# Altium PCB PCB1.PcbDoc (part 3 of 3)
Units mm, origin at the board's own origin, x right, y up, seen from the top; angles counter-clockwise.
Board outline 200 x 55 mm, 4 copper layers (Top Layer, Power Layer, GND Layer, Bottom Layer), stack 1.714 mm thick; 304 components, 225 nets, 1091 pads, 659 vias.
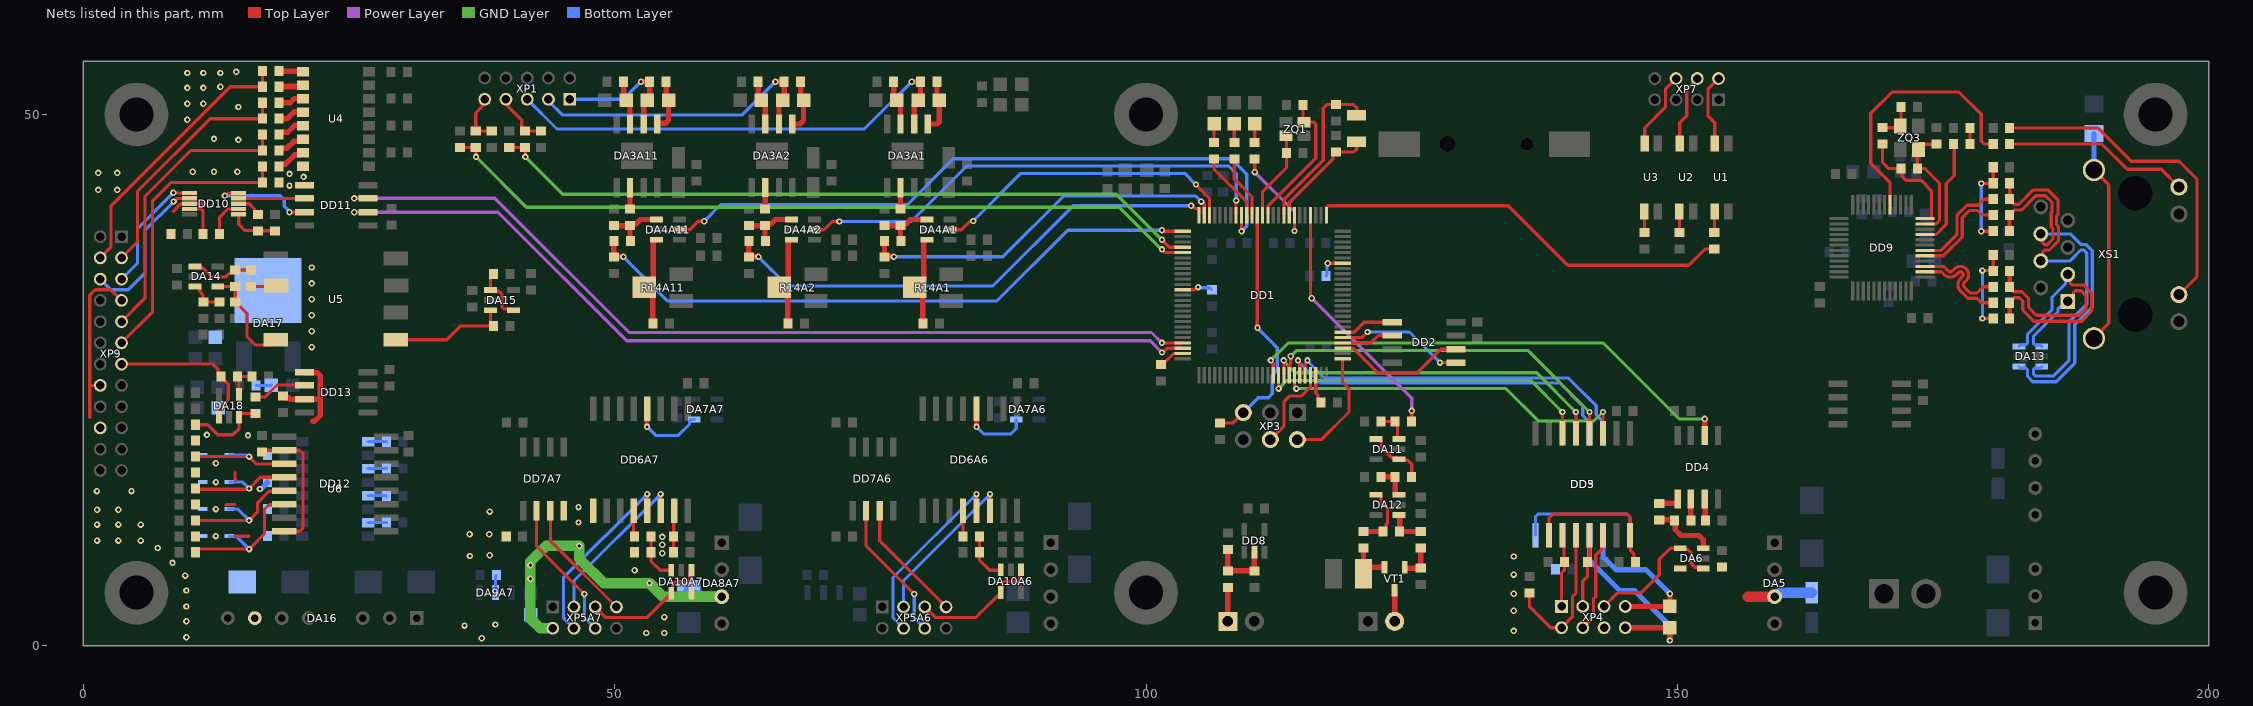
[diagram p5: the nets of this part, all layers, seen from the top]

## Via types
v1: diameter 0.6, hole 0.3, Top Layer to Bottom Layer, tented both sides, 643 vias
v2: diameter 0.6, hole 0.3, Top Layer to Bottom Layer, 12 vias
v3: diameter 0.8, hole 0.4, Top Layer to Bottom Layer, tented both sides, 4 vias

## Nets (pads, with @x,y where several pads share a name; then routed paths per layer and width w, separated by ;. In a path a pad name is that pad's centre, name@x,y a point inside that pad or via, vN(x,y) a via of type N, cw(c..) or ccw(c..) an arc to the next point about the centre after c; other vN are vias at no path point) (continued)
GND_DRVA7: C45A7.2 C46A7.2 C47A7.2 C48A7.1 C49A7.2 C50A7.2 C51A7.2 DA8A7.3 DA9A7.2 DA10A7.5 DD6A7.9 DD6A7.15 DD7A7.4 XP5A7.2 | length 38.1
  Top Layer w0.3: C50A7.2@55.525,8.8 C46A7.2@55.525,10.3 55.56,10.335 55.56,12.665 DD6A7.15@55.595,12.7
  GND Layer w1: XP5A7.2@44.175,1.65 42.994,1.65 42.075,2.569 v1(42.075,6.3) v1(42.075,7.571) 42.075,7.9 43.575,9.4 v1(46.675,9.4) 46.675,8.2 48.975,5.9 v1(53.275,5.9) 54.555,4.62 DA8A7.3@60.075,4.62
  Bottom Layer w0.2: C51A7.2@38.775,6.559 C51A7.2@38.883,6.667
  Bottom Layer w0.3: DA9A7.2@38.775,5 38.775,5.075 C51A7.2@38.775,6.559
  Bottom Layer w1: C45A7.2@56.975,5.2 57.475,4.7 58.081,4.7 58.161,4.62 DA8A7.3@60.075,4.62
  other v1: 37.5,0.7 52.975,1.2 54.675,1.2 35.875,1.9 38.775,2 54.675,2.7 51.875,7.1 36.375,8.45 38.25,8.525 54.475,8.7 54.475,9.5 54.475,10.25 36.35,10.5 38.2,10.5 46.6,11.6 38.244,12.625 46.6,13.05
GND_HW: C75.2 C76.2 C80.2 C81.2 C88.1 C89.2 C90.2 C91.2 DA16.7 DA17.2 DD10.1 DD10.8 DD11.5 DD12.2 DD12.8 DD13.5 DD13.7 R50.1 R51.1 R53.1 R54.1 R56.1 R57.1 R58.1 R60.1 R82.1 R84.1 R85.1 R86.1 R88.1 R89.1 U4.2 U4.4 U4.6 U4.8 VD4.2 VD5.2 VD6.2 VD7.2 XP9.7 XP9.16 XP9.20 | length 62.1
  Top Layer w0.3: 0.6,21.5 0.6,24.5 ; XP9.16@1.6,24.5 0.6,24.5 ; XP9.7@3.6,32.5 2.6,33.5 1.1,33.5 0.6,33 0.6,24.5 ; 8.473,40.85 8.737,41.114 8.737,41.162 9.176,41.6 DD10.8@10,41.6 11.411,41.6 11.543,41.468 ; 13.444,13.27 13.474,13.3 14.275,13.3 ; 14.275,10.3 15.6,10.3 ; 14.275,16.3 14.288,16.287 14.288,15.627 14.345,15.57 ; 14.625,40.35 14.625,39.65 15.196,39.079 16.396,39.079 C76.2@16.425,39.05 C80.2@18.025,39.05 ; C81.2@16.764,18.4 20.344,18.4 20.68,18.064 20.68,11.109 20.351,10.78 DD12.8@18.9,10.78 ; R50.1@18.404,52.621 18.534,52.75 U4.2@20.68,52.75 U4.2@20.53,52.6
  Top Layer w0.5: R56.1@18.425,46.6 18.425,46.65 18.6,46.825 19.171,46.825 19.811,47.465 20.475,47.465 U4.6@20.68,47.67 ; R53.1@18.425,49.6 19.223,49.6 19.88,50.257 20.633,50.257 U4.4@20.68,50.21 ; R50.1@18.425,52.6 U4.2@20.53,52.6 ; C89.2@18.8,23.5 18.975,23.325 19.328,23.325 19.453,23.2 22.3,23.2 ; DD13.5@20.8,25.75 20.85,25.7 22.007,25.7 22.3,25.407 22.3,23.2 ; 21.582,21.125 21.741,21.125 22.3,21.684 22.3,23.2
  Bottom Layer w0.3: C90.2@16.25,24.5 17.665,24.5 C88.1@17.7,24.535
  Bottom Layer w0.5: v1(16.621,14.75) 16.64,14.769 16.744,14.769 17.325,15.35 R86.1@17.325,15.4
  other v1: 9.7,0.8 9.7,2.3 9.7,3.7 9.7,5.2 9.6,6.6 8.4,7.8 7,9.2 1.3,9.9 3.3,9.9 5.4,9.9 12.475,10.32 1.3,11.4 3.3,11.4 5.4,11.4 1.3,12.8 3.3,12.8 12.475,12.86 1.283,14.55 4.537,14.55 12.475,15.4 12.477,17.179 15.5,19.8 11.632,19.845 21.5,28.1 21.5,29.6 21.5,31.1 21.5,32.6 21.5,34.1 21.5,35.6 1.4,42.9 3.2,42.9 19.4,43.3 20.737,44.125 19.4,44.4 1.4,44.5 3.2,44.5 10.3,44.6 12.3,44.6 14.5,44.6 14.6,47.6 12.3,47.7 9.8,49.5 14.6,50.7 9.8,51 11.3,51 9.8,52.5 11.3,52.5 12.9,52.6 9.8,53.9 11.3,53.9 12.9,53.9 14.4,54
GND_PS: C35.2 C36.2 C37.2 C38.2 C39.2 C40.2 DA5.3 DA6.5 DD3.2 DD3.8 DD4.5 DD4.7 DD5.9 DD5.16 XP4.6 | length 36.7
  Top Layer w0.3: DD3.2@137.92,10.41 137.92,12.013 138.307,12.4 145.268,12.4 145.54,12.128 DD3.8@145.54,10.41 145.568,10.382 145.568,8.985 145.925,8.628 C36.2@145.925,8.325 ; C36.2@146.025,8.15 C36.2@146.3,7.875
  Top Layer w0.5: C39.2@148.3,13.4 149.974,13.4 150.024,13.45 DD4.5@150.024,13.8 ; DD4.7@152.574,13.8 152.612,13.762 152.612,11.838 C37.2@152.65,11.8
  Top Layer w1: 156.61,4.62 DA5.3@159.15,4.62
  Bottom Layer w0.3: DD5.16@136.65,10.41 136.65,12.15 136.9,12.4 145.268,12.4 145.54,12.128 DD5.9@145.54,10.41
  Bottom Layer w1: DA5.3@159.15,4.62 159.258,4.62 159.638,5 C35.2@162.65,5
  other v1: 134.6,1.4 134.6,3.3 134.6,4.9 134.6,6.7 134.6,8.4
GUIDE_LAS: DD1.4 R23.1 | length 23.4
  Top Layer w0.3: DD1.4@115.475,40.525 115.475,32.906 115.6,32.781 v1(115.6,32.7) ; R23.1@125,21.1 v1(125,22.1)
  Power Layer w0.3: v1(115.6,32.7) 125,23.3 v1(125,22.1)
IL1_HW: R50.2 R63.1 XP9.4 | length 25.8
  Top Layer w0.3: XP9.4@1.6,36.5 2.6,37.5 2.6,41.376 13.824,52.6 R50.2@16.949,52.6 ; R50.2@16.875,52.6 R63.1@16.875,54.1
IL2_HW: R53.2 R64.1 XP9.3 | length 23
  Top Layer w0.3: XP9.3@3.6,36.5 5.1,38 5.1,42.77 11.93,49.6 R53.2@16.875,49.6 R64.1@16.875,51.1
KEY_HW: R56.2 R65.1 XP9.9 | length 27
  Top Layer w0.3: XP9.9@3.6,30.5 5.8,32.7 5.8,42.279 10.121,46.6 R56.2@16.85,46.6 ; R56.2@16.875,46.6 R65.1@16.875,48.1
LED1: DD1.16 R5.1 | length 6.5
  Top Layer w0.3: R5.1@106.4,45.8 106.4,44.848 109.475,41.773 DD1.16@109.475,40.525
LED2: DD1.15 R6.1 | length 6
  Top Layer w0.3: R6.1@108.31,45.8 108.31,43.94 109.975,42.275 DD1.15@109.975,40.525
LED3: DD1.7 R7.1 | length 9.8
  Top Layer w0.3: v1(110.225,44.575) R7.1@110.225,45.8 ; v1(113.975,39.025) DD1.7@113.975,40.525
  Power Layer w0.3: v1(110.225,44.575) 113.975,40.825 v1(113.975,39.025)
LNKn: DD9.17 R44.2 | length 25.2
  Top Layer w0.3: DD9.17@170,41.5 170,43.6 168.2,45.4 168.2,50.1 170.2,52.1 176.5,52.1 178.6,50 178.6,47.5 178.888,47.212 R44.2@179.725,47.212
MEM_CS: DD1.81 DD2.1 | length 5.1
  Top Layer w0.3: DD1.81@118.5,29.5 119.6,29.5 120.546,30.446 DD2.1@123.171,30.446
MEM_MISO: DD1.79 DD2.2 | length 5
  Top Layer w0.3: DD1.79@118.5,28.5 121.15,28.5 121.846,29.196 DD2.2@123.171,29.196
MEM_MOSI: DD1.80 DD2.5 | length 12.1
  Top Layer w0.3: DD1.80@118.5,29 120.314,29 120.839,29.525 v1(120.85,29.525) ; v1(127.671,26.646) DD2.5@129.171,26.646
  Bottom Layer w0.3: v1(120.85,29.525) 124.791,29.525 v1(127.671,26.646)
MEM_SCLK: DD1.78 DD2.6 | length 12.5
  Top Layer w0.3: DD1.78@118.5,28 119.5,28 121.812,25.688 125.513,25.688 127.721,27.896 DD2.6@129.171,27.896
MP_EN_HW: R58.2 R66.1 XP9.11 | length 27.1
  Top Layer w0.3: XP9.11@3.6,28.5 6.5,31.4 6.5,41.83 8.27,43.6 R58.2@16.8,43.6 ; R58.2@16.875,43.6 R66.1@16.875,45.1
NetC12_1: C12.1 DD1.49 | length 2.5
  Top Layer w0.3: C12.1@101.4,26.45 101.675,26.725 101.826,26.725 102.601,27.5 DD1.49@103.45,27.5
NetC14_1: C14.1 DD1.73 | length 2.8
  Top Layer w0.3: DD1.73@115.975,25.475 115.975,23.777 116.183,23.569 116.183,23.167 C14.1@116.45,22.9
NetC23A1_2: C23A1.2 DA3A1.3 R8A1.1 | length 4.2
  Top Layer w0.5: C23A1.2@76.25,53.075 76.25,51.64 R8A1.1@76.55,51.34 76.9,50.99 DA3A1.3@76.9,49.105
NetC23A2_2: C23A2.2 DA3A2.3 R8A2.1 | length 4.2
  Top Layer w0.3: R8A2.1@63.535,51.595 R8A2.1@63.8,51.33
  Top Layer w0.5: R8A2.1@63.503,51.606 C23A2.2@63.503,53.076 ; R8A2.1@63.768,51.341 64.153,50.956 64.153,50.676 64.166,50.663 DA3A2.3@64.166,49.106
NetC23A11_2: C23A11.2 DA3A11.3 R8A11.1 | length 4.4
  Top Layer w0.5: C23A11.2@50.85,53.075 50.85,51.565 R8A11.1@51.075,51.34 ; R8A11.1@50.962,51.453 51.45,50.965 DA3A11.3@51.45,49.105
NetC24A1_1: C24A1.1 DA3A1.1 R9A1.1 | length 5
  Top Layer w0.5: DA3A1.1@79.45,49.105 80.35,49.105 80.55,49.305 R9A1.1@80.55,51.34 80.335,51.555 C24A1.1@80.335,53.075
NetC24A2_1: C24A2.1 DA3A2.1 R9A2.1 | length 4.9
  Top Layer w0.5: DA3A2.1@66.716,49.106 67.441,49.106 67.768,49.433 67.768,51.341 67.503,51.606 C24A2.1@67.503,53.076
NetC24A11_1: C24A11.1 DA3A11.1 R9A11.1 | length 4.9
  Top Layer w0.5: DA3A11.1@54,49.105 54,49.112 54.05,49.162 54.782,49.162 55.075,49.455 R9A11.1@55.075,51.34 54.85,51.565 C24A11.1@54.85,53.075
NetC39_1: C39.1 DA6.3 R17.2 | length 6.1
  Top Layer w0.5: C39.1@148.3,11.85 149.675,11.85 149.805,11.72 149.805,10.92 150.35,10.375 152.025,10.375 152.425,9.975 ; DA6.3@152.425,9.175 152.425,9.875
NetC49A6_1: C49A6.1 DA10A6.3 R22A6.2 | length 4.7
  Top Layer w0.3: R22A6.2@84.335,10.353 84.335,8.051 85.283,7.103 86.286,7.103 DA10A6.3@86.335,7.153
NetC49A7_1: C49A7.1 DA10A7.3 R22A7.2 | length 4.6
  Top Layer w0.3: R22A7.2@53.425,10.3 53.425,7.95 54.275,7.1 DA10A7.3@55.325,7.1
NetC52_1: C52.1 DA11.3 R23.2 | length 3.1
  Top Layer w0.3: C52.1@122.1,21.1 R23.2@123.45,21.1 123.675,20.875 DA11.3@123.675,19.45
NetC55_1: C55.1 DA12.1 R26.1 | length 3.5
  Top Layer w0.5: DA12.1@123.871,12.307 C55.1@123.871,10.757 R26.1@125.871,10.757
NetC55_2: C55.2 DA12.4 R27.1 | length 6.1
  Top Layer w0.3: DA12.4@121.65,14.207 121.975,14.207 122.1,14.082 122.1,13.907 122.1,13.5 122.731,12.869 122.731,11.583 122.596,11.447 122.596,11.032 C55.2@122.321,10.757
  Top Layer w0.5: R27.1@120.471,10.757 C55.2@122.321,10.757
NetC56_1: C56.1 DD8.2 R33.2 R34.1 | length 6.3
  Top Layer w0.5: R34.1@107.7,9.05 R33.2@107.7,7.05 C56.1@110.2,7.05 DD8.2@110.2,8.8
NetC59_1: C59.1 XS1.13 XS1.14 | length 20.4
  Top Layer w0.3: XS1.13@189.2,28.932 190.6,30.332 190.6,43.372 XS1.14@189.2,44.772
  Bottom Layer w0.5: XS1.14@189.2,44.772 C59.1@189.2,48.2
NetC61_1: C61.1 R35.2 R36.2 | length 8.1
  Top Layer w0.3: v1(178.7,30.8) 179.703,30.8 R35.2@179.725,30.778 ; v1(178.7,35.3) 179.703,35.3 R36.2@179.725,35.278 C61.1@179.725,36.778
  Bottom Layer w0.3: v1(178.7,30.8) v1(178.7,35.3)
NetC62_1: C62.1 R37.2 R38.2 | length 8.3
  Top Layer w0.3: v1(178.6,39) 179.7,39 R37.2@179.725,39.025 ; v1(178.6,43.5) 179.7,43.5 R38.2@179.725,43.525 C62.1@179.725,45.025
  Bottom Layer w0.3: v1(178.6,39) v1(178.6,43.5)
NetC66_1: C66.1 R48.2 ZQ3.3 | length 3.6
  Top Layer w0.3: R48.2@169.3,48.75 170.825,48.75 ZQ3.3@170.975,48.9 171.05,48.975 C66.1@171.05,50.7
NetC76_1: C76.1 DD10.3 | length 2.4
  Top Layer w0.3: DD10.3@14.6,41.6 15.6,41.6 16.1,41.1 16.1,40.875 16.375,40.6 C76.1@16.425,40.6
NetC78_1: C78.1 DD10.9 | length 3.4
  Top Layer w0.3: DD10.9@10.117,41.1 11.099,41.1 11.275,40.924 C78.1@11.275,38.75
NetC78_2: C78.2 DD10.2 | length 3.7
  Top Layer w0.3: C78.2@12.825,38.75 12.825,40.325 13.6,41.1 DD10.2@14.6,41.1
NetC79_1: C79.1 DA14.1 R69.1 | length 6
  Top Layer w0.3: DA14.1@10.502,35.7 10.627,35.575 11.225,35.575 12.09,34.71 13.413,34.71 13.777,35.075 14.025,35.075 C79.1@14.3,35.35 ; C79.1@14.25,35.35 R69.1@15.8,35.35
NetC79_2: C79.2 DA14.4 R71.1 U5.4 | length 10.1
  Top Layer w0.3: DA14.4@12.652,33.8 C79.2@14.3,33.8 R71.1@14.3,32.35 14.35,32.35 15.4,31.3 15.4,29.1 16.2,28.3 17.624,28.3 U5.4@18.124,28.8
NetC92_1: C92.1 DA18.3 R81.2 | length 7.4
  Top Layer w0.3: C92.1@10.575,20.8 11.7,20.8 12.65,19.85 14.075,19.85 14.658,20.433 DA18.3@14.658,21.5 ; DA18.3@14.658,21.725 14.783,21.85 R81.2@16.2,21.85
NetDA3A1_6: DA3A1.6 R10A1.1 | length 2.2
  Top Layer w0.5: R10A1.1@76.9,40.93 DA3A1.6@76.9,43.105
NetDA3A2_6: DA3A2.6 R10A2.1 | length 2
  Top Layer w0.5: R10A2.1@64.15,41.08 64.158,41.088 DA3A2.6@64.158,43.098
NetDA3A11_6: DA3A11.6 R10A11.1 | length 2.2
  Top Layer w0.5: R10A11.1@51.45,40.93 DA3A11.6@51.45,43.105
NetDA4A1_1: DA4A1.1 R10A1.2 R11A1.1 R12A1.1 | length 5.8
  Top Layer w0.5: R11A1.1@75.4,39.53 R10A1.2@76.9,39.53 ; R12A1.1@76.9,37.98 76.9,39.38 77.075,39.555 77.075,39.655 77.125,39.705 77.413,39.705 77.813,40.105 DA4A1.1@79.402,40.105
NetDA4A1_3: DA4A1.3 R13A1.2 R14A1.2 | length 8.9
  Top Layer w0.5: R14A1.2@78.225,33.73 R14A1.2@78.25,33.73 ; R13A1.2@79,30.33 79,32.98 R14A1.2@78.25,33.73 ; DA4A1.3@79.356,38.186 79.081,38.186 79.075,38.18 79.075,34.48 78.325,33.73 R14A1.2@78.25,33.73
NetDA4A2_1: DA4A2.1 R10A2.2 R11A2.1 R12A2.1 | length 5.6
  Top Layer w0.5: R11A2.1@62.65,39.53 R10A2.2@64.15,39.53 ; R12A2.1@64.15,38.13 R10A2.2@64.15,39.53 ; DA4A2.1@66.65,40.105 65.125,40.105 64.725,39.705 64.325,39.705 R10A2.2@64.15,39.53
NetDA4A2_3: DA4A2.3 R13A2.2 R14A2.2 | length 8.5
  Top Layer w0.5: R14A2.2@65.831,33.186 66.325,33.68 66.325,38.18 66.339,38.194 DA4A2.3@66.65,38.194 ; R14A2.2@66.094,33.186 66.3,32.98 R13A2.2@66.3,30.33
NetDA4A11_1: DA4A11.1 R10A11.2 R11A11.1 R12A11.1 | length 5.8
  Top Layer w0.5: R11A11.1@49.95,39.53 R10A11.2@51.45,39.53 ; R12A11.1@51.45,37.98 51.45,39.38 51.625,39.555 51.625,39.655 51.675,39.705 52.025,39.705 52.425,40.105 DA4A11.1@53.95,40.105
NetDA4A11_3: DA4A11.3 R13A11.2 R14A11.2 | length 8.5
  Top Layer w0.5: R14A11.2@52.8,33.73 52.875,33.73 53.625,34.48 53.625,38.18 53.65,38.205 DA4A11.3@53.95,38.205 ; R13A11.2@53.6,30.33 R14A11.2@53.6,33.655
NetDA6_1: DA6.1 DA6.4 XP4.5 | length 13.8
  Top Layer w0.3: XP4.5@143.1,3.7 144.398,4.998 146.598,4.998 148.3,6.7 148.3,8.125 149.35,9.175 DA6.4@150.275,9.175 150.4,9.05 151,9.05 151.306,8.744 151.306,7.719 151.632,7.393 152.307,7.393 DA6.1@152.425,7.275
NetDA7A6_4: DA7A6.4 DD6A6.4 | length 6.8
  Top Layer w0.3: v1(84.05,20.6) v1@84.053,20.603 ; DD6A6.4@84.053,22.301 DD6A6.4@84.055,22.303
  Top Layer w0.5: v1@84.053,20.603 DD6A6.4@84.053,22.301
  Bottom Layer w0.3: v1(84.05,20.6) 84.725,19.925 87.27,19.925 87.789,20.443 DA7A6.4@87.789,21.3
NetDA7A7_4: DA7A7.4 DD6A7.4 | length 7.3
  Top Layer w0.3: v1(53.05,20.6) v1@53.052,20.602 ; DD6A7.4@53.052,22.298 DD6A7.4@53.055,22.3
  Top Layer w0.5: v1@53.052,20.602 DD6A7.4@53.052,22.298
  Bottom Layer w0.3: v1(53.05,20.6) 53.85,19.8 55.991,19.8 57.041,20.85 57.041,21.175 57.166,21.3 DA7A7.4@57.491,21.3
NetDA10A6_1: DA10A6.1 DA10A6.4 XP5A6.5 | length 12.2
  Top Layer w0.3: XP5A6.5@79.185,3.653 80.168,2.671 84.003,2.671 DA10A6.4@86.335,5.003 86.46,5.128 86.46,5.877 86.636,6.053 87.935,6.053 88.11,6.229 88.11,7.028 DA10A6.1@88.235,7.153
NetDA10A7_1: DA10A7.1 DA10A7.4 XP5A7.5 | length 12.1
  Top Layer w0.3: XP5A7.5@48.175,3.65 49.175,2.65 53.025,2.65 DA10A7.4@55.325,4.95 55.45,5.075 55.45,5.775 55.675,6 56.775,6 57.1,6.325 57.1,6.975 DA10A7.1@57.225,7.1
NetDA11_1: DA11.1 DA11.4 R24.1 | length 5.9
  Top Layer w0.3: DA11.4@121.65,19.45 121.975,19.45 122.1,19.325 122.1,18.7 123.125,17.675 123.675,17.675 123.881,17.469 124.631,17.469 125,17.1 R24.1@125,15.9
NetDA12_3: DA12.3 R24.2 R25.1 | length 3.4
  Top Layer w0.5: R25.1@122.1,15.9 R24.2@123.45,15.9 123.45,14.332 123.575,14.207 DA12.3@123.871,14.207
NetDA14_3: DA14.3 R55.2 R59.1 | length 3.5
  Top Layer w0.3: DA14.3@10.502,33.8 10.827,33.8 10.952,33.675 10.952,33.35 11.253,33.049 11.253,32.397 R55.2@11.3,32.35 R59.1@12.8,32.35
NetDA15_1: DA15.1 DA15.4 R76.1 | length 5.3
  Top Layer w0.3: R76.1@38.6,34.979 38.6,34.929 38.324,34.653 DA15.1@38.324,33.479 38.442,33.362 39.118,33.362 39.4,33.079 39.4,31.88 39.576,31.704 40.349,31.704 DA15.4@40.474,31.579
NetDA15_3: DA15.3 R75.1 U5.5 | length 11.2
  Top Layer w0.3: U5.5@29.399,28.8 34.2,28.8 35.479,30.079 R75.1@38.325,30.079 ; DA15.3@38.324,31.579 38.324,30.854 38.325,30.853 R75.1@38.325,30.079 ; R75.1@38.6,30.079 R75.1@38.325,30.079
NetDA18_4: DA18.4 R83.2 R87.1 | length 3.2
  Top Layer w0.3: DA18.4@14.658,23.65 14.658,25.197 R87.1@14.505,25.35 15.949,25.35 R83.2@15.966,25.333
NetDD1_37: DD1.37 R3.1 | length 2.9
  Top Layer w0.3: DD1.37@103.45,33.5 104.586,33.5 104.836,33.75 v1(104.9,33.75)
  Bottom Layer w0.3: v1(104.9,33.75) 104.957,33.693 105.998,33.693 R3.1@106.134,33.556
NetDD1_94: DD1.94 R4.1 | length 2.7
  Top Layer w0.3: v1(117.1,36) 117.875,36 DD1.94@118.5,36
  Bottom Layer w0.3: R4.1@116.95,34.8 117.025,34.875 117.025,35.925 v1(117.1,36)
NetDD3_3: DD3.3 R18.2 XP4.1 | length 6.9
  Top Layer w0.3: XP4.1@139.1,3.7 139.1,6.85 139.374,7.124 R18.2@139.374,7.875 139.328,7.922 139.328,10.272 DD3.3@139.19,10.41
NetDD3_4: DD3.4 R20.2 XP4.2 | length 14.4
  Top Layer w0.3: R20.2@136.075,4.95 136.075,3.725 138.1,1.7 XP4.2@139.1,1.7 140.124,2.724 140.124,4.599 140.46,4.935 DD3.4@140.46,10.41
NetDD3_5: DD3.5 R21.2 XP4.3 | length 7
  Top Layer w0.3: XP4.3@141.1,3.7 141.1,6.075 141.55,6.525 R21.2@141.55,7.875 141.73,8.055 DD3.5@141.73,10.41
NetDD3_6: DD3.6 XP4.4 | length 9.5
  Top Layer w0.3: XP4.4@141.1,1.7 142.1,2.7 142.1,4.4 142.328,4.628 142.328,8.527 142.85,9.049 142.85,10.26 DD3.6@143,10.41
NetDD4_6: DD4.6 R17.1 | length 2
  Top Layer w0.5: R17.1@151.275,11.8 DD4.6@151.274,13.8
NetDD5_11: DD5.11 R19.1 XP4.7 | length 15.2
  Top Layer w0.5: XP4.7@145.1,3.7 R19.1@149.3,3.7 v1(149.3,4.9)
  Bottom Layer w0.5: DD5.11@143,10.41 143,8.375 144.225,7.15 147.05,7.15 v1(149.3,4.9)
NetDD5_12: DD5.12 R19.2 XP4.8 | length 19.3
  Top Layer w0.5: XP4.8@145.1,1.7 R19.2@149.3,1.7 v1(149.3,0.5)
  Bottom Layer w0.5: DD5.12@141.73,10.41 141.73,8.043 144.598,5.175 145.986,5.175 149.3,1.861 v1(149.3,0.5)
NetDD6A6_12: DD6A6.12 R22A6.1 | length 2.4
  Top Layer w0.3: R22A6.1@82.785,10.353 DD6A6.12@82.785,12.753
NetDD6A6_13: DD6A6.13 XP5A6.4 | length 17.9
  Top Layer w0.3: DD6A6.13@84.055,12.703 84.059,12.707 v1@84.059,14.275
  Bottom Layer w0.3: XP5A6.4@77.185,1.653 76.198,2.641 76.198,6.423 v1(84.05,14.275)
NetDD6A6_14: DD6A6.14 XP5A6.3 | length 15.6
  Top Layer w0.3: DD6A6.14@85.325,12.703 85.333,12.711 v1@85.333,14.271
  Bottom Layer w0.3: XP5A6.3@77.185,3.653 77.185,6.135 v1(85.325,14.275)
NetDD6A7_12: DD6A7.12 R22A7.1 | length 2.4
  Top Layer w0.3: DD6A7.12@51.785,12.7 51.785,10.39 R22A7.1@51.875,10.3
NetDD6A7_13: DD6A7.13 XP5A7.4 | length 17.9
  Top Layer w0.3: DD6A7.13@53.055,12.7 53.058,12.704 v1(53.058,14.272)
  Bottom Layer w0.3: XP5A7.4@46.175,1.65 45.175,2.65 45.175,6.388 v1(53.058,14.272)
NetDD6A7_14: DD6A7.14 XP5A7.3 | length 15.6
  Top Layer w0.3: DD6A7.14@54.325,12.7 54.326,12.701 v1(54.326,14.274)
  Bottom Layer w0.3: XP5A7.3@46.175,3.65 46.175,6.122 v1(54.326,14.274)
NetDD7A6_2: DD7A6.2 XP5A6.6 | length 13.3
  Top Layer w0.3: DD7A6.2@73.65,12.7 73.65,9.425 v1(78.2,4.875)
  Bottom Layer w0.3: v1(78.2,4.875) 78.2,2.638 XP5A6.6@79.185,1.653
NetDD7A6_3: DD7A6.3 XP5A6.7 | length 11.6
  Top Layer w0.3: DD7A6.3@74.95,12.7 74.95,9.888 XP5A6.7@81.185,3.653
NetDD7A7_2: DD7A7.2 XP5A7.6 | length 13.3
  Top Layer w0.3: DD7A7.2@42.65,12.7 42.65,9.375 v1(47.15,4.875)
  Bottom Layer w0.3: v1(47.15,4.875) 47.15,2.675 XP5A7.6@48.175,1.65
NetDD7A7_3: DD7A7.3 XP5A7.7 | length 11.6
  Top Layer w0.3: DD7A7.3@43.95,12.7 43.95,9.875 XP5A7.7@50.175,3.65
NetDD9_9: DD9.9 R47.2 | length 10.2
  Top Layer w0.3: DD9.9@173.3,38.7 174.05,38.7 174.345,38.7 175.3,39.655 175.3,43.5 176.051,44.251 R47.2@176.051,47.126
NetDD10_4: DD10.4 DD11.6 | length 6.2
  Top Layer w0.3: DD10.4@14.6,42.1 DD11.6@20.8,42.1
NetDD10_5: DD10.5 DD11.7 | length 9.9
  Top Layer w0.3: v1(13.325,42.35) 13.406,42.35 13.656,42.6 DD10.5@14.625,42.6 ; v1(19.4,40.8) DD11.7@20.8,40.8
  Bottom Layer w0.3: v1(13.325,42.35) 18.525,42.35 18.918,41.957 18.918,41.363 19.4,40.881 v1(19.4,40.8)
NetDD12_3: DD12.3 R67.2 VD7.1 | length 11
  Top Layer w0.3: R67.2@10.575,17.8 13.875,17.8 v1(15.6,17.8) 16.3,17.1 18.87,17.1 DD12.3@18.9,17.13 DD12.3@19.4,17.13
  Bottom Layer w0.3: VD7.1@13.75,17.94 15.379,17.94 15.519,17.8 v1(15.6,17.8)
NetDD12_4: DD12.4 R61.2 VD6.1 | length 10.9
  Top Layer w0.3: R61.2@10.575,14.8 10.643,14.732 15.45,14.732 15.519,14.8 v1(15.6,14.8) 16.66,15.86 DD12.4@18.9,15.86
  Bottom Layer w0.3: VD6.1@13.75,15.4 15,15.4 v1(15.6,14.8)
NetDD12_5: DD12.5 R68.2 VD5.1 | length 12.4
  Top Layer w0.3: R68.2@10.575,11.8 v1(15.6,11.8) 16.4,12.6 16.4,13.47 17.476,14.546 18.856,14.546 DD12.5@18.9,14.59
  Bottom Layer w0.3: VD5.1@13.612,12.872 14.534,12.872 v1@15.603,11.803
NetDD12_6: DD12.6 R62.2 VD4.1 | length 13.9
  Top Layer w0.3: R62.2@10.575,8.8 10.575,8.825 10.85,9.1 v1(15.6,9.1) 17.05,10.55 17.05,12.85 17.476,13.276 18.856,13.276 DD12.6@18.9,13.32
  Bottom Layer w0.3: VD4.1@13.75,10.3 13.758,10.292 14.408,10.292 v1(15.6,9.1)
NetDD13_6: DD13.6 R81.1 | length 5.1
  Top Layer w0.3: R81.1@16.2,23.4 17.09,23.4 18.225,24.535 20.765,24.535 DD13.6@20.8,24.5
NetR5_2: R5.2 VD1.1 | length 1.8
  Top Layer w0.3: R5.2@106.4,47.35 VD1.1@106.4,49.1
NetR6_2: R6.2 VD2.1 | length 1.7
  Top Layer w0.3: R6.2@108.31,47.35 VD2.1@108.31,49.1
NetR7_2: R7.2 VD3.1 | length 1.8
  Top Layer w0.3: R7.2@110.225,47.31 VD3.1@110.225,49.11
NetR26_2: R26.2 R28.2 VT1.1 | length 3.5
  Top Layer w0.5: VT1.1@124.346,7.382 124.421,7.307 R28.2@125.871,7.307 ; R28.2@125.85,7.307 R26.2@125.85,9.207
NetR27_2: R27.2 R29.2 VT1.2 | length 4.6
  Top Layer w0.5: R29.2@120.446,6.782 R29.2@120.471,6.807 ; R27.2@120.471,9.207 R29.2@120.471,6.807 ; VT1.2@122.446,7.382 121.046,7.382 R29.2@120.471,6.807
NetR30_1: R30.1 U1.1 | length 2
  Top Layer w0.3: R30.1@153.475,38.875 153.475,38.95 153.5,38.975 U1.1@153.5,40.875
NetR31_1: R31.1 U2.1 | length 2
  Top Layer w0.3: R31.1@150.2,38.875 150.2,38.95 U2.1@150.2,40.875
NetR32_1: R32.1 U3.1 | length 2
  Top Layer w0.3: R32.1@146.9,38.875 146.9,38.95 U3.1@146.9,40.875
NetR33_1: R33.1 XP8.1 | length 3.2
  Top Layer w0.5: XP8.1@107.7,2.3 R33.1@107.7,5.5
NetR41_1: R41.1 XS1.10 | length 31.2
  Top Layer w0.3: R41.1@181.275,48.712 189.588,48.712 192.7,45.6 197.2,45.6 198.9,43.9 198.9,34.74 XS1.10@197.2,33.04
NetR44_1: R44.1 XS1.12 | length 17.6
  Top Layer w0.3: R44.1@181.275,47.212 189.947,47.212 192.326,44.832 195.538,44.832 XS1.12@197.2,43.17
NetR45_2: R45.2 R47.1 | length 1.5
  Top Layer w0.3: R47.1@177.525,47.212 R45.2@177.525,48.712
NetR63_2: R63.2 U4.1 | length 2.3
  Top Layer w0.3: R63.2@18.425,54.1 R63.2@18.456,54.069 ; U4.1@20.631,54.069 U4.1@20.68,54.02
  Top Layer w0.5: R63.2@18.456,54.069 U4.1@20.631,54.069
NetR64_2: R64.2 U4.3 | length 2.4
  Top Layer w0.5: R64.2@18.425,51.1 19.475,51.1 19.88,51.505 20.655,51.505 U4.3@20.68,51.48
NetR65_2: R65.2 U4.5 | length 2.7
  Top Layer w0.5: R65.2@18.425,48.1 18.425,48.15 18.6,48.325 19.239,48.325 19.88,48.966 20.654,48.966 U4.5@20.68,48.94
NetR66_2: R66.2 U4.7 | length 2.8
  Top Layer w0.5: R66.2@18.425,45.1 18.425,45.15 18.6,45.325 19.032,45.325 19.902,46.195 20.475,46.195 U4.7@20.68,46.4
NetR69_2: R69.2 U5.2 | length 2.4
  Top Layer w0.3: R69.2@15.8,33.8 18.074,33.8 U5.2@18.174,33.9
NetR77_1: R77.1 U6.1 | length 1.7
  Bottom Layer w0.3: U6.1@26.82,19.21 28.515,19.21 R77.1@28.525,19.2
NetR78_1: R78.1 U6.3 | length 1.7
  Bottom Layer w0.3: U6.3@26.82,16.67 28.495,16.67 R78.1@28.525,16.7
NetR79_1: R79.1 U6.5 | length 1.7
  Bottom Layer w0.3: U6.5@26.82,14.13 28.495,14.13 R79.1@28.525,14.1
NetR80_1: R80.1 U6.7 | length 1.7
  Bottom Layer w0.3: U6.7@26.82,11.59 26.83,11.6 R80.1@28.525,11.6
NetU1_4: U1.4 XP7.2 | length 6.8
  Top Layer w0.3: U1.4@153.525,47.275 153.525,49.225 152.875,49.875 152.875,52.375 XP7.2@153.875,53.375
NetU2_4: U2.4 XP7.4 | length 6.8
  Top Layer w0.3: U2.4@150.225,47.275 150.225,49.225 150.878,49.878 150.878,52.378 XP7.4@151.875,53.375
NetU3_4: U3.4 XP7.6 | length 7.3
  Top Layer w0.3: U3.4@146.925,47.275 146.925,48.725 148.875,50.675 148.875,52.375 XP7.6@149.875,53.375
NetVT1_3: VT1.3 XP6.2 | length 3
  Top Layer w0.3: XP6.2@123.371,2.257 XP6.2@123.396,2.282
  Top Layer w0.5: XP6.2@123.396,2.282 VT1.3@123.396,5.232
NRST: C17.1 DD1.14 XP3.5 | length 23.7
  Top Layer w0.3: C17.1@107.083,20.975 108.195,20.975 XP3.5@109.16,21.94 ; DD1.14@110.475,40.525 110.475,29.939 v1(110.487,29.928)
  Bottom Layer w0.3: XP3.5@109.16,21.94 110.553,23.333 111.508,23.333 111.875,23.7 111.875,25.457 112.354,25.936 112.354,28.061 111.424,28.99 v1(110.487,29.928)
OSC0: C18.1 DD1.12 ZQ1.1 | length 13.3
  Top Layer w0.3: DD1.12@111.475,40.525 111.475,41.375 115.975,45.875 115.975,49.099 115.799,49.275 ZQ1.1@114.875,49.275 114.775,49.375 C18.1@114.775,50.875
OSC1: C21.1 DD1.13 ZQ1.3 | length 8.4
  Top Layer w0.3: DD1.13@110.975,40.525 110.975,42.75 113.225,45 113.225,46.225 C21.1@113.15,46.3 ; ZQ1.3@113.175,47.975 113.225,47.925 C21.1@113.225,46.375
OSC32_0: C19.1 DD1.8 ZQ2.1 | length 10.5
  Top Layer w0.3: DD1.8@113.475,40.525 113.475,41.675 117.582,45.782 117.582,46.2 117.857,46.475 119.575,46.475 119.825,46.725 ZQ2.1@119.825,47.425
OSC32_1: C20.1 DD1.9 ZQ2.2 | length 15.7
  Top Layer w0.3: DD1.9@112.975,40.525 112.975,41.978 116.675,45.678 116.675,50.575 117.025,50.925 C20.1@117.875,50.925 119.525,50.925 119.825,50.625 ZQ2.2@119.825,49.925
PD1: C24A1.2 DA3A1.2 R9A1.2 XP1.5 | length 44.2
  Top Layer w0.3: R9A1.2@78.2,50.99 R9A1.2@78.55,51.34 R9A1.2@78.785,51.575
  Top Layer w0.5: v1(77.95,53.075) C24A1.2@78.785,53.075 R9A1.2@78.785,51.575 ; DA3A1.2@78.2,49.105 R9A1.2@78.2,50.99
  Bottom Layer w0.3: XP1.5@41.774,51.425 44.574,48.625 73.5,48.625 v1(77.95,53.075)
PD1_ADC: C27A1.1 DD1.24 R12A1.2 | length 35.3
  Top Layer w0.3: v1(105.198,41.798) 105.279,41.798 105.427,41.65 105.469,41.65 105.475,41.644 DD1.24@105.475,40.525
  Top Layer w0.5: R12A1.2@75.375,38.075 75.387,38.062 75.387,36.612 C27A1.1@75.4,36.6 v1(76.275,36.6)
  Bottom Layer w0.3: v1(76.275,36.6) 86.525,36.6 92.25,42.325 104.664,42.325 105.191,41.798 v1(105.198,41.798)
PD1_ERR: DA4A1.5 DD1.23 | length 29.2
  Top Layer w0.3: DA4A1.5@81.55,39.155 82.632,39.155 83.394,39.918 83.693,39.918 v1(83.75,39.975) ; v1(104.7,43.4) 105.975,42.125 DD1.23@105.975,40.525
  Bottom Layer w0.3: v1(83.75,39.975) 88.225,44.45 103.65,44.45 v1(104.7,43.4)
PD2: C24A2.2 DA3A2.2 R9A2.2 XP1.3 | length 28.4
  Top Layer w0.3: R9A2.2@65.498,51.028 R9A2.2@65.985,51.515
  Top Layer w0.5: v1(65.125,53.075) C24A2.2@65.953,53.076 R9A2.2@65.953,51.526 ; DA3A2.2@65.466,49.106 R9A2.2@65.466,51.039
  Bottom Layer w0.3: XP1.3@43.774,51.425 43.774,51.236 45.054,49.955 62.005,49.955 v1(65.125,53.075)
PD2_ADC: C27A2.1 DD1.25 R12A2.2 | length 48.8
  Top Layer w0.3: v1(104.242,41.4) 104.323,41.4 104.573,41.15 104.975,41.15 DD1.25@104.975,40.525
  Top Layer w0.5: R12A2.2@62.625,38.075 62.625,36.625 C27A2.1@62.65,36.6 v1(63.525,36.6)
  Bottom Layer w0.3: v1(63.525,36.6) 66.275,33.85 85.591,33.85 93.141,41.4 v1(104.242,41.4)
PD2_ERR: DA4A2.5 DD1.18 | length 46.4
  Top Layer w0.3: DA4A2.5@68.8,39.155 69.705,39.155 70.475,39.925 v1(71.15,39.925) ; DD1.18@108.475,40.525 108.475,41.875 v1(108.5,41.9)
  Bottom Layer w0.3: v1(71.15,39.925) 77.913,39.925 83.138,45.15 107.769,45.15 108.5,44.419 v1(108.5,41.9)
PD3: C24A11.2 DA3A11.2 R9A11.2 XP1.1 | length 12.4
  Top Layer w0.5: v1(52.475,53.075) C24A11.2@53.3,53.075 53.3,51.565 R9A11.2@53.075,51.34 52.75,51.015 DA3A11.2@52.75,49.105
  Bottom Layer w0.3: XP1.1@45.774,51.425 50.825,51.425 v1(52.475,53.075)
PD3_ADC: C27A11.1 DD1.26 R12A11.2 | length 59.5
  Top Layer w0.3: v1(101.5,39.1) 101.581,39.1 101.681,39 DD1.26@103.45,39
  Top Layer w0.5: R12A11.2@49.925,38.075 49.925,36.625 C27A11.1@49.95,36.6 v1(50.825,36.6)
  Bottom Layer w0.3: v1(50.825,36.6) 54.969,32.456 85.981,32.456 92.625,39.1 v1(101.5,39.1)
PD3_ERR: DA4A11.5 DD1.17 | length 63.8
  Top Layer w0.3: DA4A11.5@56.1,39.155 57.08,39.155 57.875,39.95 v1(58.425,39.95) ; DD1.17@108.975,40.525 108.975,39.025 v1(109,39)
  Bottom Layer w0.3: v1(58.425,39.95) 60,41.525 77.575,41.525 81.875,45.825 108.016,45.825 109.475,44.366 109.475,39.475 v1(109,39)
PMO_HW: DA18.1 R87.2 XP9.13 | length 14.5
  Top Layer w0.3: XP9.13@3.6,26.5 12.2,26.5 12.684,26.016 12.684,25.621 R87.2@12.955,25.35 ; DA18.1@12.758,21.5 12.883,21.625 12.883,22.372 13.635,23.124 13.635,24.62 R87.2@12.955,25.3
POWER_IND: DD1.1 R30.2 | length 40.2
  Top Layer w0.3: DD1.1@116.975,40.525 116.975,41.224 117.151,41.4 134.1,41.4 139.7,35.8 151.075,35.8 152.6,37.325 R30.2@153.475,37.325
PS_ERR1: DD1.66 DD3.14 | length 31.5
  Top Layer w0.3: v1(112.475,24.2) DD1.66@112.475,25.475 ; v1(139.186,22) v1(139.186,22) 139.188,20.012 DD3.14@139.19,20.01
  GND Layer w0.3: v1(112.475,24.2) 113.25,24.975 136.211,24.975 v1(139.186,22)
PS_ERR2: DD1.67 DD3.13 | length 32.9
  Top Layer w0.3: v1(112.954,26.85) 112.975,26.829 DD1.67@112.975,25.475 ; v1(140.456,22) v1(140.456,22) 140.458,20.012 DD3.13@140.46,20.01
  GND Layer w0.3: v1(112.954,26.85) 112.954,26.769 114.034,25.688 136.768,25.688 v1(140.456,22)
PS_ERR3: DD1.68 DD3.12 | length 34.5
  Top Layer w0.3: DD1.68@113.475,25.475 113.475,26.4 113.625,26.55 v1(113.625,27.25) ; DD3.12@141.73,20.01 v1(141.73,22)
  GND Layer w0.3: v1(113.625,27.25) 114.15,27.775 135.955,27.775 v1(141.73,22)
PS_ON: DD1.69 DD3.11 | length 33.8
  Top Layer w0.3: DD1.69@113.975,25.475 113.975,24.456 114.15,24.281 v1(114.15,24.2) ; DD3.11@143,20.01 v1(143,22)
  GND Layer w0.3: v1(114.15,24.2) 133.874,24.2 136.915,21.16 142.16,21.16 v1(143,22)
PS_PV: DD1.65 DD4.2 | length 47.5
  Top Layer w0.3: v1(111.75,26.85) 111.75,26.769 111.975,26.544 DD1.65@111.975,25.475
  Top Layer w0.5: DD4.2@152.574,19.801 v1@152.574,21.349
  GND Layer w0.3: v1(111.75,26.85) 113.389,28.489 143.011,28.489 150.15,21.35 v1(152.575,21.35)
RD_N: DA13.4 R37.1 R40.2 XS1.6 | length 35.9
  Top Layer w0.3: R40.2@181.275,40.525 181.275,40.575 181.698,40.998 182.379,40.998 183.729,42.347 184.635,42.347 185.25,41.732 185.25,40.806 185.19,40.746 185.19,39.394 185.35,39.234 185.35,38.281 184.806,37.737 184.558,37.737 184.382,37.913 184.382,38.575 XS1.6@184.2,38.757
  Top Layer w0.381: R37.1@181.275,39.025 R40.2@181.275,40.525
  Bottom Layer w0.3: DA13.4@182.15,26.275 182.275,26.15 182.772,26.15 182.948,25.974 182.948,25.346 183.448,24.846 185.646,24.846 187.4,26.6 187.4,30.217 188.892,31.708 188.892,31.762 189.035,31.905 189.035,37.167 188.437,37.764 187.948,37.764 186.955,38.757 XS1.6@184.2,38.757
RD_P: DA13.3 R38.1 R43.2 XS1.4 | length 35
  Top Layer w0.3: R38.1@181.275,43.525 R43.2@181.275,42.025 181.275,41.975 181.698,41.552 182.15,41.552 183.499,42.901 184.864,42.901 185.804,41.962 185.804,40.576 185.69,40.462 185.69,39.601 185.85,39.441 185.85,38.074 185.013,37.237 184.558,37.237 184.382,37.062 184.382,36.4 XS1.4@184.2,36.217
  Bottom Layer w0.3: XS1.4@184.2,36.217 186.955,36.217 187.986,37.249 188.223,37.249 188.519,36.953 188.519,32.119 186.846,30.446 186.846,26.829 185.417,25.4 183.678,25.4 183.502,25.576 183.502,25.974 183.678,26.15 184.175,26.15 DA13.3@184.3,26.275
Rx232: DD1.48 DD11.2 | length 85.1
  Top Layer w0.3: v1(25.5,40.8) DD11.2@27.001,40.8 ; v1(101.5,27.6) 101.608,27.6 102.008,28 DD1.48@103.45,28
  Power Layer w0.3: v1(25.5,40.8) 39.025,40.8 51.125,28.7 100.4,28.7 v1(101.5,27.6)
Rx232_HW: DD10.7 XP9.6 | length 15.3
  Top Layer w0.3: v1(8.5,41.8) 8.581,41.8 8.881,42.1 DD10.7@10.571,42.1
  Bottom Layer w0.3: XP9.6@1.6,34.5 2.6,33.5 4.247,33.5 5.8,35.053 5.8,39.1 v1(8.5,41.8)
RxCAN: DD1.70 DD5.5 | length 32.9
  Top Layer w0.3: v1(114.3,26.85) 114.3,26.769 114.475,26.594 DD1.70@114.475,25.475
  Bottom Layer w0.3: v1(114.3,26.85) 114.3,26.8 116.375,24.725 138.925,24.725 141.1,22.55 141.1,21.668 141.58,21.188 141.58,20.16 DD5.5@141.73,20.01
RXI_N: DD9.5 R40.1 | length 9.4
  Top Layer w0.3: DD9.5@173.3,36.7 175.031,36.7 176.8,38.469 176.8,40.293 177.465,40.958 178.243,40.958 178.675,40.525 R40.1@179.725,40.525
RXI_P: DD9.6 R43.1 | length 9.5
  Top Layer w0.3: DD9.6@173.3,37.2 174.824,37.2 176.3,38.676 176.3,40.5 177.257,41.458 178.258,41.458 178.825,42.025 R43.1@179.725,42.025
SWCLK: DD1.76 XP3.2 | length 11.2
  Top Layer w0.3: XP3.2@114.24,19.4 116.5,19.4 119.1,22 119.1,24.178 118.5,24.778 DD1.76@118.5,27
SWDIO: DD1.72 XP3.4 | length 8.3
  Top Layer w0.3: XP3.4@111.7,19.4 113,20.7 113,22.996 113.494,23.49 114.59,23.49 115.475,24.375 DD1.72@115.475,25.475
T1: R15A3.2 R16A3.1 XP1.7 | length 5.3
  Top Layer w0.3: XP1.7@39.774,51.425 39.946,51.253 39.946,50.785 41.261,49.47 41.261,48.7 41.536,48.425 R16A3.1@41.583,48.425 ; R16A3.1@41.833,48.425 R15A3.2@43.333,48.425
T1_ADC: C30A3.1 DD1.29 R16A3.2 | length 67.5
  Top Layer w0.3: C30A3.1@40.333,46.875 R16A3.2@41.583,46.875 41.6,46.858 v1(41.6,46) ; v1(101.5,38.2) 102.2,37.5 DD1.29@103.45,37.5
  GND Layer w0.3: v1(41.6,46) 45.109,42.491 97.209,42.491 v1(101.5,38.2)
T2: R15A4.2 R16A4.1 XP1.9 | length 4.8
  Top Layer w0.3: XP1.9@37.774,51.425 37.602,51.253 37.602,50.805 36.933,50.137 R16A4.1@36.933,48.425 R15A4.2@38.433,48.425
T2_ADC: C30A4.1 DD1.30 R16A4.2 | length 72.6
  Top Layer w0.3: C30A4.1@35.433,46.875 R16A4.2@36.933,46.875 36.95,46.858 v1(36.95,46) ; v1(101.5,37.3) 101.526,37.3 101.826,37 DD1.30@103.45,37
  GND Layer w0.3: v1(36.95,46) 41.677,41.273 97.477,41.273 101.45,37.3 v1(101.5,37.3)
TD_N: DA13.6 R35.1 R39.2 XS1.3 | length 25.1
  Top Layer w0.3: R39.2@181.275,32.507 181.454,32.507 181.698,32.751 182.197,32.751 182.5,32.447 182.5,31.599 183.554,30.546 188.046,30.546 189,31.5 189,33.183 188.229,33.954 187.125,33.954 186.949,34.13 186.949,34.738 XS1.3@186.74,34.947
  Top Layer w0.381: R35.1@181.275,30.778 R39.2@181.275,32.277
  Bottom Layer w0.3: DA13.6@182.15,28.175 182.275,28.3 182.772,28.3 182.948,28.476 182.948,29.331 185.25,31.633 185.25,32.812 186.531,34.093 186.531,34.738 XS1.3@186.74,34.947
TD_P: DA13.1 R36.1 R42.2 XS1.1 | length 20.6
  Top Layer w0.3: R42.2@181.275,33.778 181.275,33.728 181.698,33.305 182.426,33.305 183.054,32.676 183.054,31.829 183.783,31.1 187.817,31.1 188.446,31.729 188.446,32.954 188,33.4 187.447,33.4 187.271,33.225 187.271,32.939 XS1.1@186.74,32.407
  Top Layer w0.381: R42.2@181.275,33.778 R36.1@181.275,35.278
  Bottom Layer w0.3: DA13.1@184.3,28.175 184.175,28.3 183.678,28.3 183.502,28.476 183.502,29.102 185.804,31.404 185.804,31.682 185.98,31.857 186.19,31.857 XS1.1@186.74,32.407
Tx232: DD1.47 DD11.3 | length 85.1
  Top Layer w0.3: v1(25.5,42.1) DD11.3@26.979,42.1 ; v1(101.5,28.5) 102.3,28.5 DD1.47@103.45,28.5
  Power Layer w0.3: v1(25.5,42.1) 25.514,42.114 38.736,42.114 51.367,29.483 100.517,29.483 v1(101.5,28.5)
Tx232_HW: DD10.6 XP9.5 | length 11.7
  Top Layer w0.3: v1(8.481,42.637) 8.5,42.619 10.016,42.619 DD10.6@10.034,42.6
  Bottom Layer w0.3: XP9.5@3.6,34.5 5.1,36 5.1,39.256 v1(8.481,42.637)
TxCAN: DD1.71 DD5.6 | length 33.3
  Top Layer w0.3: DD1.71@114.975,25.475 114.975,26.544 115.2,26.769 v1(115.2,26.85)
  Bottom Layer w0.3: v1(115.2,26.85) 115.2,26.8 116.8,25.2 139.75,25.2 142.375,22.575 142.375,21.753 142.85,21.278 142.85,20.16 DD5.6@143,20.01
TXO_N: DD9.2 R39.1 | length 9.4
  Top Layer w0.3: DD9.2@173.3,35.2 174.827,35.2 174.838,35.2 175.042,34.996 175.114,34.924 ; 175.115,34.923 ccw(c175.681,35.488) 176.247,34.923 176.437,35.112 cw(c176.631,34.918) 176.826,35.112 cw(c176.631,34.918) 176.826,34.723 176.636,34.534 ccw(c177.202,33.968) 176.636,33.402 177.033,33.005 177.338,32.7 177.44,32.7 178.2,32.7 178.623,32.277 R39.1@179.725,32.277
TXO_P: DD9.3 R42.1 | length 9.5
  Top Layer w0.3: DD9.3@173.3,35.7 175.045,35.7 175.186,35.559 175.396,35.349 175.469,35.276 ccw(c175.681,35.488) 175.893,35.276 176.083,35.466 cw(c176.631,34.918) 177.179,35.466 cw(c176.631,34.918) 177.181,34.371 176.989,34.18 ccw(c177.202,33.968) 176.989,33.756 177.387,33.359 177.545,33.2 177.94,33.2 178.2,33.2 178.778,33.778 R42.1@179.725,33.778
XSCI: DD9.12 R46.2 R48.1 | length 11
  Top Layer w0.3: R48.1@169.3,47.2 169.3,45.5 169.9,44.9 R46.2@171.025,44.9 171.149,44.776 171.149,44.151 171.5,43.8 172.934,43.8 173.9,42.834 173.9,40.2 DD9.12@173.3,40.2
XSCO: C64.1 DD9.11 R46.1 ZQ3.1 | length 11.4
  Top Layer w0.3: DD9.11@173.3,39.7 174.345,39.7 174.665,40.02 174.665,43.535 173.3,44.9 R46.1@172.575,44.9 172.575,46.575 ZQ3.1@172.7,46.7 172.7,46.75 173.15,47.2 C64.1@174.375,47.2
pads on no net: DA1.3 DA1.5 DA1.8 DA2.4 DA3A1.5 DA3A2.5 DA3A11.5 DA16.3 DA16.5 DA16.8 DD1.46 DD1.51 DD1.52 DD1.77 DD1.82 DD1.83 DD1.84 DD1.85 DD1.86 DD1.87 DD1.88 DD1.96 DD1.97 DD1.98 DD5.1 DD5.4 DD5.10 DD5.14 DD5.15 DD6A6.7 DD6A6.11 DD6A7.7 DD6A7.11 DD8.1 DD9.18 DD9.19 DD9.21 DD9.34 DD9.35 DD9.37 DD9.38 DD9.39 DD9.40 DD9.41 DD9.42 DD9.43 DD9.44 DD12.7 U5.7 U5.8 XP3.6 XP5A6.8 XP5A7.8 XP7.7 XP7.8 XS1. XS1.7 XS1.8

## Polygon pours and split planes (outlines as drawn)
GND on Top Layer "GND_L01_P006" (solid, remove dead copper, pour order 6): 189.4,10.65 189.4,21.987 189.487,21.987 192,24.5 200,24.5 200,45.497 193,45.497 190.5,47.997 190.5,54.997 158.75,54.997 158.75,42.5 143,42.5 143,55 104.375,55 104.375,48.375 102,46 97.875,46 95.5,48.375 95.5,55 89.05,55 89.05,31.675 83.875,26.5 32,26.5 32,55 25.5,55 25.5,9.3 33,9.3 33,12.626 37.874,17.5 95.5,17.5 99.5,13.5 104.4,8.6 104.4,0 128.5,0 128.5,14 132.5,18 152,18 172.003,18 180.175,18 180.175,10.65
GND_PS on Top Layer "GND_PS_L01_P013" (solid, remove dead copper, pour order 13): 133.5,0 133.5,15.5 157.45,15.5 157.45,0
GND_DRVA7 on Top Layer "GND_DRVA7_L01_P002" (solid, remove dead copper, pour order 2): 38.475,13.85 35.072,10.447 35.072,0 58.275,0 58.275,13.85
GND_DRVA6 on Top Layer "GND_DRVA6_L01_P000" (solid, remove dead copper, pour order 0): 65.745,13.853 65.745,0.003 89.345,0.003 89.345,13.853
GND_HW on Top Layer "GND_HW_L01_P008" (solid, remove dead copper, pour order 8): 9,0 9,6.5 6.5,9 0,9 0,46 6,46 9,49 9,55 22,55 22,0
AGND on Top Layer "AGND_L01_P017" (solid, remove dead copper, pour order 17): 34,55 34,28.5 82.25,28.5 87,33.25 87,55
GND on Bottom Layer "GND_L04_P009" (solid, remove dead copper, pour order 9): 200,24.5 189,24.5 186.98,22.48 176.482,22.48 172.002,18 132.5,18 128.5,14 128.5,0 104.4,0 104.4,8.6 99.5,13.5 95.5,17.5 37.874,17.5 33,12.626 33,9.3 25.5,9.3 25.5,19 25.5,55 32,55 32,26.5 83.875,26.5 89.05,31.675 89.05,55 95.5,55 95.5,48.375 97.877,45.998 101.998,45.998 104.375,48.375 104.375,55 143,55 143,42.5 158.75,42.5 158.75,55 190.5,55 190.5,49 193.502,45.998 200,45.998
GND_PS on Bottom Layer "GND_PS_L04_P012" (solid, remove dead copper, pour order 12): 133.5,0 133.5,15.5 157.45,15.5 157.45,0
GND_DRVA7 on Bottom Layer "GND_DRVA7_L04_P003" (solid, remove dead copper, pour order 3): 40.125,15.5 35.072,10.447 35.072,0 58.275,0 58.275,15.5
GND_DRVA6 on Bottom Layer "GND_DRVA6_L04_P001" (solid, remove dead copper, pour order 1): 65.745,15.503 65.745,0.003 89.245,0.003 89.245,15.503
GND_HW on Bottom Layer "GND_HW_L04_P015" (solid, remove dead copper, pour order 15): 9,0 9,6.5 6.5,9 0,9 0,46 6,46 9,49 9,55 22,55 22,0
AGND on Bottom Layer "AGND_L04_P005" (solid, remove dead copper, pour order 5): 34,55 34,28.5 52.499,28.5 73.5,28.5 82.25,28.5 87,33.25 87,55
GND on GND Layer "GND_L03_P018" (solid, remove dead copper, pour order 18): 25.5,55 32,55 32,26.5 83.875,26.5 89.05,31.675 89.05,55 95.5,55 95.5,48.375 97.877,45.998 101.998,45.998 104.375,48.375 104.375,55 143,55 143,42.497 158.75,42.497 158.75,55 190.5,55 190.5,49 193.502,45.998 200,45.998 200,24.5 192,24.5 189.4,21.928 189.4,10.65 180.175,10.65 180.175,18 132.5,18 128.5,14 128.5,0 104.4,0 104.4,8.6 95.5,17.5 38.01,17.5 33,12.49 33,9.3 25.5,9.3
GND_HW on GND Layer "GND_HW_L03_P016" (solid, remove dead copper, pour order 16): 9,0 9,6.5 6.5,9 0,9 0,46 6,46 9,49 9,55 22,55 22,0
AGND_HW on GND Layer "AGND_HW_L03_P007" (solid, remove dead copper, pour order 7): 7.5,35.995 11.4,35.995 12.405,37 20.5,37 20.5,26 17.5,23 17.5,19.2 7.5,19.2 7.5,36.1
AGND on GND Layer "AGND_L03_P004" (solid, remove dead copper, pour order 4): 34,55 34,28.5 82.25,28.5 87,33.25 87,55

## Silkscreen, mask and mechanical layers (free items; w line width, h text height)
Top Overlay:
  drawing of 37 lines, arcs and shapes, not listed
  text "Low-profile laser / Control board / Rev.1" at 158.575,9.725 h3
Top Assy:
  circle w0.2: c100,50 r1.6
  circle w0.2: c100,5 r1.6
  circle w0.2: c5,50 r1.6
  circle w0.2: c195,50 r1.6
  circle w0.2: c195,5 r1.6
  circle w0.2: c5,5 r1.6
Bottom Assy:
  circle w0.2: c100,50 r1.6
  circle w0.2: c100,5 r1.6
  circle w0.2: c5,50 r1.6
  circle w0.2: c195,50 r1.6
  circle w0.2: c195,5 r1.6
  circle w0.2: c5,5 r1.6
Board Outline:
  the board outline again, w0.2